# Altium PCB PCB1.PcbDoc
Units mm, origin at the board's own origin, x right, y up, seen from the top; angles counter-clockwise.
Board outline 107 x 57 mm, 2 copper layers (Top Layer, Bottom Layer); 62 components, 61 nets, 266 pads, 34 vias.
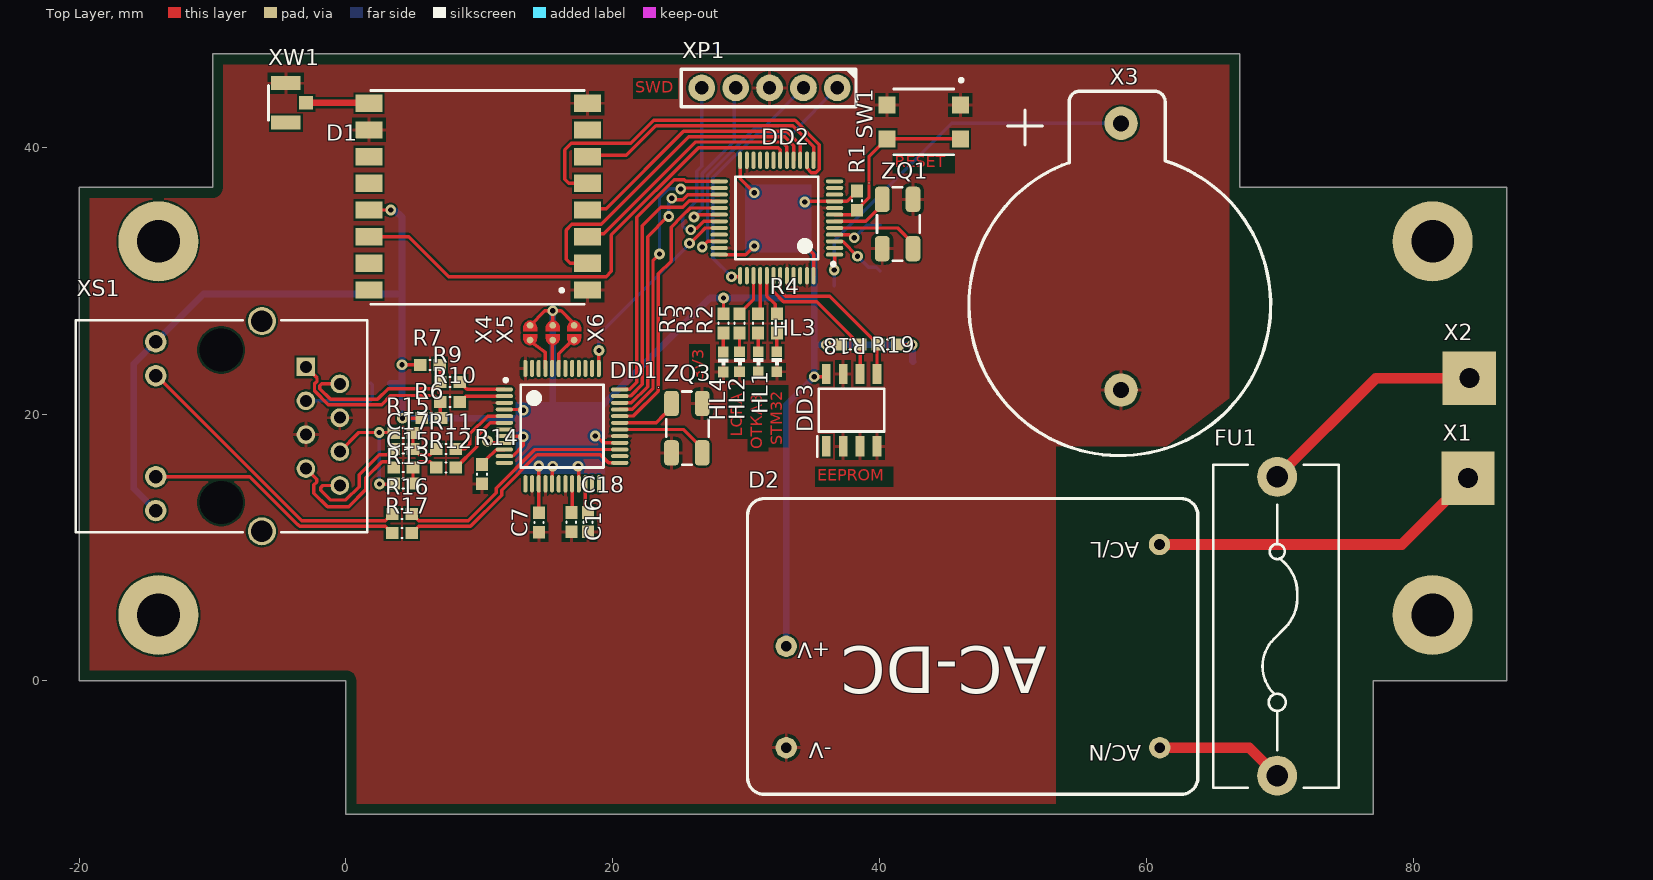
[diagram p0: Top Layer view]
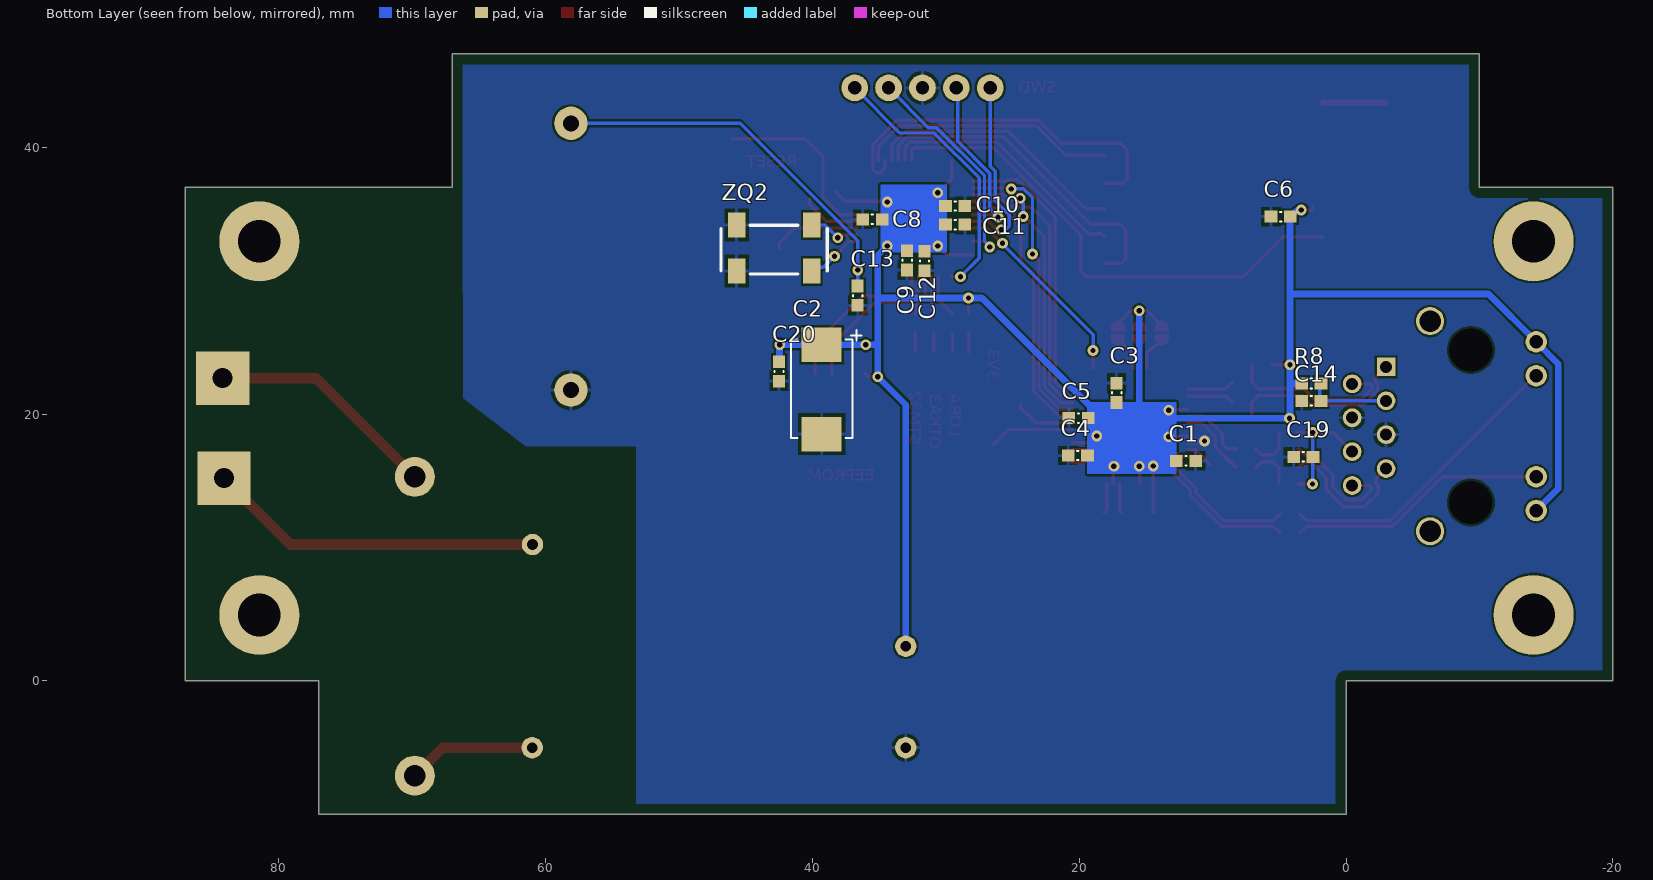
[diagram p1: Bottom Layer view, seen from below]
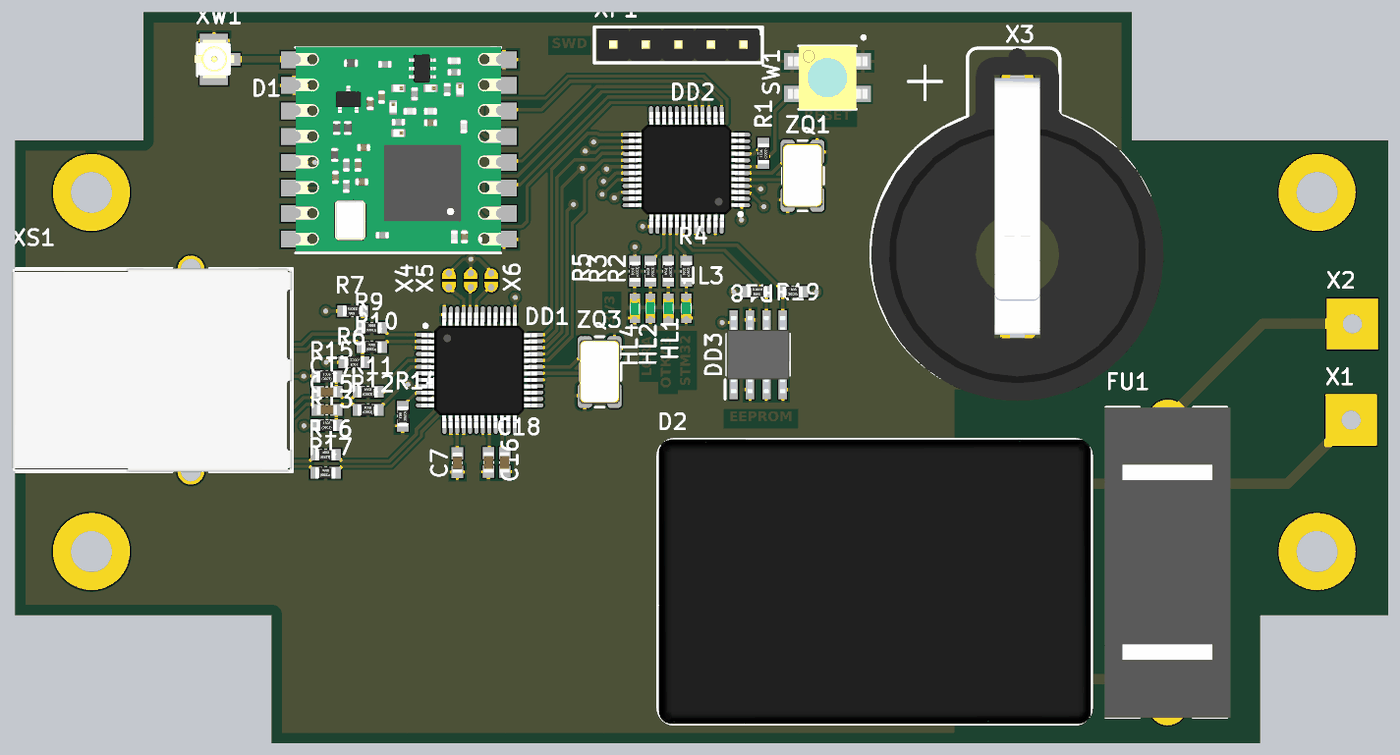
[diagram p2: 3D render of the assembled board from above, using the file's embedded part models]
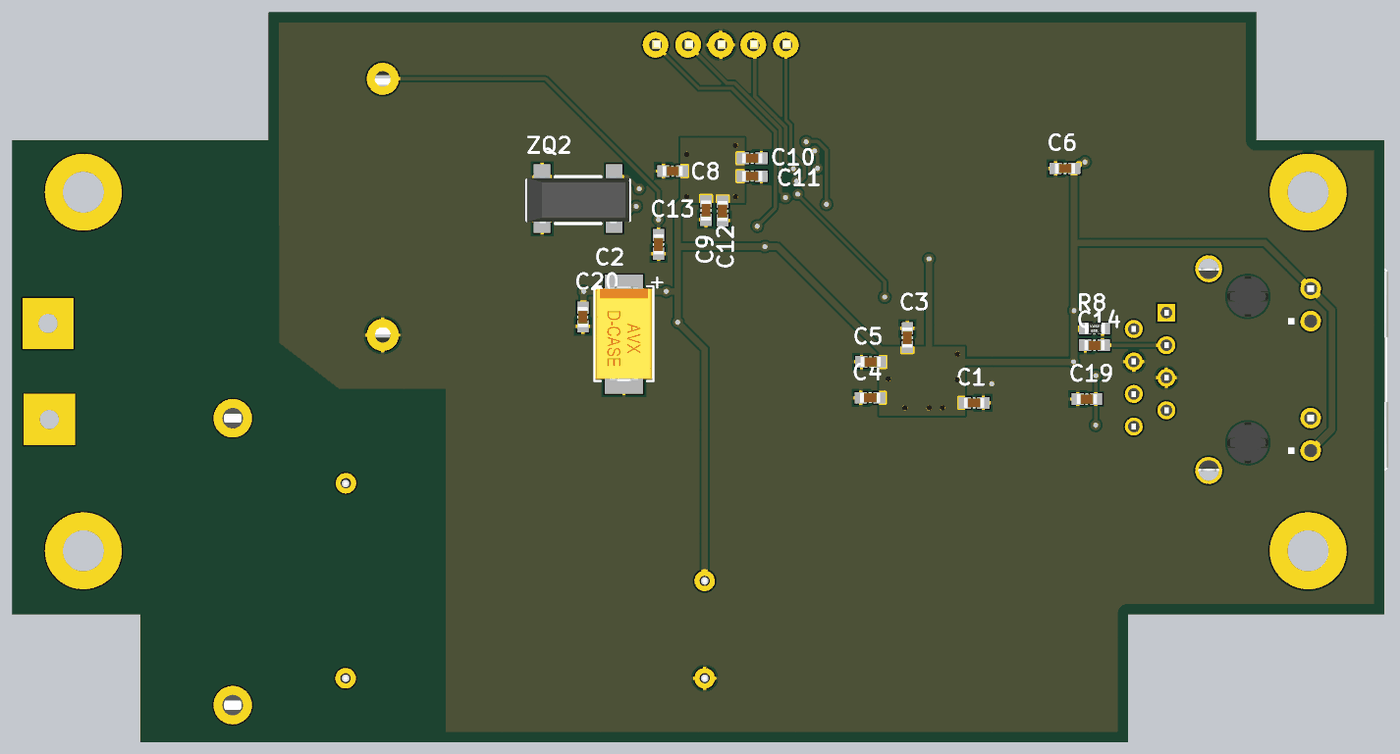
[diagram p3: 3D render of the assembled board from below, using the file's embedded part models]

## Layer stack, top to bottom
Top Solder: solder mask 0.0102, Solder Resist, Dk 3.5
Top Layer: signal copper 0.0356
Dielectric 1: dielectric 0.32, FR-4, Dk 4.8
Bottom Layer: signal copper 0.0356
Bottom Solder: solder mask 0.0102, Solder Resist, Dk 3.5

## Board outline
-20,0 -20,37 -10,37 -10,47 67,47 67,37 87,37 87,0 77,0 77,-10 0,-10 0,0

## Design rules (kind name [scope] priority, off if disabled: settings)
BoardOutlineClearance [All] p1: gap=0.8 ignorepadtopadclearanceinfootprint=FALSE
Clearance [All] p1: gap=0.15 ignorepadtopadclearanceinfootprint=FALSE
DiffPairsRouting [All] p1: maxlimit=0.254 minlimit=0.15 mostfreqgap=0.254 toplayer_minwidth=0.2 toplayer_maxwidth=0.381 toplayer_prefwidth=0.254 bottomlayer_minwidth=0.2 bottomlayer_maxwidth=0.381 bottomlayer_prefwidth=0.254 maxuncoupledlength=12.7
PolygonConnect [All] p1: connectstyle=Relief reliefconductorwidth=0.254 reliefentries=4 polygonreliefangle="90 Angle" airgapwidth=0.254
RoutingVias [All] p1: holewidth=0.4 width=0.8 viastyle="Through Hole" minholewidth=0.4 minwidth=0.8 maxholewidth=0.8 maxwidth=1.27
SolderMaskExpansion [All] p1: expansion=0.102 istentingtop=FALSE
Width [All] p1: maxlimit=1 minlimit=0.2 preferedwidth=0.254
29 further rules are at their usual default settings.

## Classes and differential pairs
component class Sheet2: C1 C2 C4 C13 D1 D2 DD1 DD2 DD3 FU1 HL1 HL2 HL3 HL4 R1 R2 R3 R4 R5 R7 R8 R9 R10 R11 R12 R13 R14 R15 R16 R17 R18 R19 SW1 X1 X2 XP1 XS1 XW1 ZQ1 ZQ3
differential pair TD: +TD_P -TD_N
differential pair RD2: +RD2_P -RD2_N
differential pair TD1: +TD1_P -TD1_N
differential pair RD: +RD_P -RD_N
differential pair RD1: +RD1_P -RD1_N

## Components (designator, comment, footprint, x,y, rotation, side; value= is the part's Value field where it differs from the comment)
C1 "0,1 мк" C_0603 12,16.5 r0 bottom value=0.1µF
C2 "10мк" D_CASE 39.3,25.2 r270 bottom value=10µF
C3 "0,1 мк" C_0603 17.2,21.6 r270 bottom value=0.1µF
C4 "0,1 мк" C_0603 20.1,16.9 r180 bottom value=0.1µF
C5 "0,1 мк" C_0603 20.055,19.7 r180 bottom value=0.1µF
C6 "0,1 мк" C_0603 4.9,34.8 r180 bottom value=0.1µF
C7 "0,1 мк" C_0603 14.465,11.873 r90 top value=0.1µF
C8 "0,1 мк" C_0603 35.5,34.6 r180 bottom value=0.1µF
C9 "0,1 мк" C_0603 32.9,31.525 r90 bottom value=0.1µF
C10 "0,1 мк" C_0603 29.3,35.6 r0 bottom value=0.1µF
C11 "0,1 мк" C_0603 29.3,34.2 r0 bottom value=0.1µF
C12 "4,7 мк" C_0603 31.6,31.475 r90 bottom value=4.7µF
C13 "0,1 мк" C_0603 36.6,28.875 r90 bottom value=0.1µF
C14 "0.022" C_0603 2.6,21 r180 bottom value=10000pF
C15 "6800" C_0603 4.3,16 r0 top value=6800pF
C16 "2,2 мк" C_0603 16.897,11.9 r270 top value=2.2µF
C17 "6800" C_0603 4.3,17.4 r0 top value=6800pF
C18 "10000" C_0603 18.144,11.898 r90 top value=10000pF
C19 "10000" C_0603 3.2,16.8 r180 bottom value=10000pF
C20 "0,1 мк" C_0603 42.5,23.2 r90 bottom value=0.1µF
D1 "RFM98W" RFM98W 17.85,44.3 r180 top
D2 "IRM-10-12" IRM-02 60.175,2.975 r180 top locked
DD1 "W5500" LQFP48 16.2,19.1 r0 top
DD2 "STM32f103c8t6" LQFP48 32.3,34.7 r180 top
DD3 "24LC1026-I_SN" SOIC127P600X175-8N 37.9,20.3 r90 top
FU1 "FHP-105" FHP-105 69.8,15.3 r270 top
HL1 "BL-HJD36A-AV" LED_0603_RED 30.9,23.9 r270 top
HL2 "BL-HKC36A-AV" LED_0603_GREEN 29.5,23.9 r270 top
HL3 "BL-HGK36G" LED_0603_GREEN 32.3,23.9 r270 top
HL4 "BL-HGK36G" LED_0603_GREEN 28.287,23.88 r270 top
R1 "100 кОм" R_0603 38.3,36 r90 top
R2 "2,2 к" R_0603 30.9,26.8 r90 top
R3 "2,2 к" R_0603 29.5,26.8 r90 top
R4 "2,2 к" R_0603 32.3,26.8 r90 top
R5 "2,2 к" R_0603 28.3,26.8 r90 top
R6 "49,9" R_0603 6.4,19.7 r180 top
R7 "49,9" R_0603 6.3,23.7 r180 top
R8 "10" R_0603 2.6,22.3 r0 bottom
R9 "33" R_0603 7.8,22.4 r0 top
R10 "33" R_0603 7.8,20.9 r0 top
R11 "33" R_0603 7.5,17.4 r0 top
R12 "33" R_0603 7.5,16 r0 top
R13 "49,9" R_0603 4.3,14.8 r0 top
R14 "12,4 к" R_0603 10.2,15.5 r90 top
R15 "49,9" R_0603 4.3,18.6 r0 top
R16 "330" R_0603 4.2,12.5 r0 top
R17 "330" R_0603 4.2,11.1 r0 top
R18 "2,2 к" R_0603 40.6,25.2 r0 top
R19 "2,2 к" R_0603 37.8,25.2 r180 top
SW1 "7914G-1-000E" 7914G 43.3,41.9 r270 top
X1 "X" TH_Сontact 84.1,15.2 r0 top
X2 "X" TH_Сontact 84.2,22.7 r0 top
X3 "KLS5-CR2032-01" KLS5-CR2032-01 58.1,21.8 r90 top
X4 "Solder_jumper" SOLDER_JUMPER 13.8,26.125 r270 top
X5 "Solder_jumper" SOLDER_JUMPER 15.5,26.125 r270 top
X6 "Solder_jumper" SOLDER_JUMPER 17.1,26.125 r270 top
XP1 "PLS-5" PLS-5 36.83,44.451 r180 top
XS1 "KLS12-TL051-1x1-G/Y-1-03" KLS12-TL051 1.642,11.153 r90 top
XW1 "IPEX-M 20279-001E-01" IPEX -4.5,43.3 r0 top
ZQ1 "8 МГц" "MJ CRYSTAL" 40.2,36.1 r270 top
ZQ2 "KX-327S" KX-327S 42.9,32.2 r0 bottom
ZQ3 "8 МГц" "MJ CRYSTAL" 24.4,20.8 r270 top

## Footprints (in the part's own frame and the unit in brackets; to place one, negate y for a bottom-side part, rotate by r counter-clockwise, add the part's x,y. Pads: shape width x height; smd on the part's side, far side on the other; paste and mask are expansions set on the pad)
7914G [mm]
  rect 1.27x1.27 smd paste+0 mask+0: 1(-1.27,2.75) 1(-1.27,-2.75) 2(1.27,-2.75) 2(1.27,2.75)
  silkscreen extent -3.25,-2.25 2.46,2.94, body extent -2.46,-3.1 2.46,3.1, height 4.54
C_0603 [mm] "Chip Resistor, 2-Leads, Body 1.60x0.80mm, IPC Medium Density"
  rect 0.95x0.9 smd: 1(-0.725,0) 2(0.725,0)
  silkscreen extent -0.05,-0.35 0.05,0.35, body extent -0.8,-0.4 0.8,0.4, height 0.8
D_CASE [mm]
  rect 2.6x3 smd: 1(0,0) 2(6.7,0)
  silkscreen extent -1.1,-2.3 7,3, body extent -0.4,-2.22 7,2.23, height 3.01
FHP-105 [mm]
  round 3 hole 1.6: 1(0,0) 2(22.4,0)
  silkscreen extent -0.9,-4.8 23.3,4.6, body extent -0.9,-4.9 23.3,4.9, height 10.9
IPEX [mm]
  rect 2.2x1.05 smd: 1(0,1.5) 3(0,-1.45)
  rect 1.05x1 smd: 2(1.525,0.025)
  silkscreen extent -1.3,-1.27 -1.3,1.33, body extent -1.52,-1.45 1.58,1.55, height 1.25
IRM-02 [mm]
  round 1.6 hole 0.8: 1(-0.825,7.975) 2(-0.8,-7.25) 3(27.175,7.975) 4(27.175,0.375)
  silkscreen extent -3.67,-10.7 30.07,11.48, body extent -3.67,-10.73 30.02,11.48, height 15
KLS5-CR2032-01 [mm]
  round 2.5 hole 1.2: 1(0,0) 2(20,0)
  silkscreen extent -4.91,-11.21 22.4,11.41, body extent -5.1,-11.4 22.4,11.4, height 8.7
KLS12-TL051 [mm]
  rect 1.4x1.4 hole 0.9: 1(12.387,4.642)
  round 1.4 hole 0.9: 2(11.117,2.102) 3(9.847,4.642) 4(8.577,2.102) 5(7.307,4.642) 6(6.037,2.102) 7(4.767,4.642) 8(3.497,2.102)
  round 1.6 hole 1.02: 9(14.267,15.892) 10(11.727,15.892) 11(4.157,15.892) 12(1.617,15.892)
  round 0 hole 3.25 unplated: MH1(13.657,10.992) MH2(2.227,10.992)
  round 2.1 hole 1.6: S1(15.817,7.942) S2(0.067,7.942)
  silkscreen extent 0,0.04 15.88,21.88, body extent 0,0.04 15.88,21.88, height 13.5
KX-327S [mm]
  rect 1.3x1.9 smd: 1(-2.85,-1.975) 2(2.775,-1.975) 3(2.775,1.475) 4(-2.85,1.475)
  silkscreen extent -4.03,-1.95 3.95,1.7, body extent -4.03,-2 3.97,1.7, height 2.5
LED_0603_GREEN [mm]
  rect 0.8x0.8 smd: 1(-0.775,0) 2(0.725,0)
  silkscreen extent -0.3,-0.4 0.25,0.4, body extent -0.8,-0.4 0.8,0.4, height 0.6
LED_0603_RED [mm]
  rect 0.8x0.8 smd: 1(-0.775,0) 2(0.725,0)
  silkscreen extent -0.3,-0.4 0.25,0.4, body extent -0.8,-0.4 0.8,0.4, height 0.65
LQFP48 [mm] "TSQFP, 48-Leads, Body 7,00x7,00mm, Pitch 0,50mm, IPC Medium Density"
  oval 1.3x0.3 smd: 1(-4.325,2.75) 2(-4.325,2.25) 3(-4.325,1.75) 4(-4.325,1.25) 5(-4.325,0.75) 6(-4.325,0.25) 7(-4.325,-0.25) 8(-4.325,-0.75) 9(-4.325,-1.25) 10(-4.325,-1.75) 11(-4.325,-2.25) 12(-4.325,-2.75) 25(4.325,-2.75) 26(4.325,-2.25) 27(4.325,-1.75) 28(4.325,-1.25) 29(4.325,-0.75) 30(4.325,-0.25) 31(4.325,0.25) 32(4.325,0.75) 33(4.325,1.25) 34(4.325,1.75) 35(4.325,2.25) 36(4.325,2.75)
  oval 0.3x1.3 smd: 13(-2.75,-4.325) 14(-2.25,-4.325) 15(-1.75,-4.325) 16(-1.25,-4.325) 17(-0.75,-4.325) 18(-0.25,-4.325) 19(0.25,-4.325) 20(0.75,-4.325) 21(1.25,-4.325) 22(1.75,-4.325) 23(2.25,-4.325) 24(2.75,-4.325) 37(2.75,4.325) 38(2.25,4.325) 39(1.75,4.325) 40(1.25,4.325) 41(0.75,4.325) 42(0.25,4.325) 43(-0.25,4.325) 44(-0.75,4.325) 45(-1.25,4.325) 46(-1.75,4.325) 47(-2.25,4.325) 48(-2.75,4.325)
  silkscreen extent -4.35,-3.1 3.1,3.57, body extent -4.53,-4.53 4.47,4.47, height 1.5
"MJ CRYSTAL" [mm]
  rrect50% 1.9x1.1 smd: 1(0,0) 2(3.7,0) 3(3.7,2.3) 4(0,2.3)
  silkscreen extent -0.9,-0.4 4.6,2.8, body extent -0.67,-0.46 4.33,2.74, height 1
PLS-5 [mm]
  round 2 hole 1: 1(0,0) 2(2.54,0) 3(5.08,0) 4(7.62,0) 5(10.16,0)
  silkscreen extent -1.4,-1.4 11.7,1.4, body extent -1.2,-1.3 11.5,1.24, height 8.54
R_0603 [mm] "Chip Resistor, 2-Leads, Body 1.60x0.80mm, IPC Medium Density"
  rect 0.95x0.9 smd: 1(-0.725,0) 2(0.725,0)
  silkscreen extent -0.05,-0.38 0.05,0.38, body extent -0.8,-0.45 0.75,0.4, height 0.45
RFM98W [mm]
  rect 2x1.3 smd: 1(-0.25,15) 2(-0.25,13) 3(-0.25,11) 4(-0.25,9) 5(-0.25,7) 6(-0.25,5) 7(-0.25,3) 8(-0.25,1) 9(16.125,1) 10(16.125,3) 11(16.125,5) 12(16.125,7) 13(16.125,9) 14(16.125,11) 15(16.125,13) 16(16.125,15)
  silkscreen extent 0,0.05 16,16.07, body extent -0.02,-0.03 15.98,15.97, height 2.04
SOIC127P600X175-8N [mm]
  rect 1.525x0.65 smd: 1(-2.712,1.905) 2(-2.712,0.635) 3(-2.712,-0.635) 4(-2.712,-1.905) 5(2.712,-1.905) 6(2.712,-0.635) 7(2.712,0.635) 8(2.712,1.905)
  silkscreen extent -3.47,-2.45 1.6,2.58, body extent -3,-2.45 3,2.45, height 1.75
SOLDER_JUMPER [mm]
  rrect100% 0.5x0.5 smd: 1(-0.525,0) 2(0.575,0)
  Top Layer region: 0.144,-0.519 0.369,-0.519 0.587,-0.491 0.777,-0.381 0.911,-0.207 0.969,0.006 0.969,0.006 0.906,0.222 0.765,0.398 0.567,0.506 0.344,0.531 0.344,0.531 0.144,0.531
  Top Layer region: -0.075,0.525 -0.3,0.525 -0.518,0.497 -0.709,0.387 -0.843,0.212 -0.9,0 -0.9,0 -0.837,-0.216 -0.696,-0.392 -0.499,-0.5 -0.275,-0.525 -0.275,-0.525 -0.075,-0.525
TH_Сontact [mm]
  rect 4x4 hole 1.5: 1(0,0)

## Part data
C1 C8 C9 C10 C11 C13 C20: library part GRM188R72A104MA35D, "CAP CER 0.1UF 100V X7R 0603", Manufacturer="Murata Electronics", Component Type=Capasitor, ComponentLink1Description=Datasheet, ComponentLink1URL=https://search.murata.co.jp/Ceramy/image/img/A01X/G101/ENG/GRM188R72A104MA35-01.pdf, Part Number=GRM188R72A104MA35D
C2: library part T491D106K035AT, "CAP TANT 10UF 10% 35V 2917", Manufacturer=KEMET, Component Type="Tantalum Capacitor", ComponentLink1Description=Datasheet, ComponentLink1URL=https://api.kemet.com/component-edge/download/datasheet/T491D106K035AT.pdf, Part Number=T491D106K035AT
C3 C4 C5 C6 C7: library part GRM188R72A104KA35D, "CAP CER 0.1UF 100V X7R 0603", Manufacturer="Murata Electronics", Component Type=Capasitor, ComponentLink1Description=Datasheet, ComponentLink1URL=https://www.murata.com/~/media/webrenewal/support/library/catalog/products/capacitor/mlcc/c02e.ashx?la=en-us, Part Number=GRM188R72A104KA35D
C12: library part GRM188R61C475KE11D, "CAP CER 4.7UF 16V X5R 0603", Manufacturer="Murata Electronics", Component Type=Capasitor, ComponentLink1Description=Datasheet, ComponentLink1URL=https://search.murata.co.jp/Ceramy/image/img/A01X/G101/ENG/GRM188R61C475KE11-01.pdf, Part Number=GRM188R61C475KE11D
C14 C18 C19: library part GRM1885C1H103JA01D, "CAP CER 10000PF 50V C0G/NP0 0603", Manufacturer="Murata Electronics", Component Type=Capasitor, ComponentLink1Description=Datasheet, ComponentLink1URL=https://www.murata.com/~/media/webrenewal/support/library/catalog/products/capacitor/mlcc/c02e.ashx?la=en-us, Part Number=GRM1885C1H103JA01D
C15 C17: library part GRM1885C1H682JA01D, "CAP CER 6800PF 50V C0G/NP0 0603", Manufacturer="Murata Electronics", Component Type=Capasitor, ComponentLink1Description=Datasheet, ComponentLink1URL=https://www.murata.com/~/media/webrenewal/support/library/catalog/products/capacitor/mlcc/c02e.ashx?la=en-us, Part Number=GRM1885C1H682JA01D
C16: library part GRM188R71A225ME15D, "CAP CER 2.2UF 10V X7R 0603", Manufacturer="Murata Electronics", Component Type=Capasitor, ComponentLink1Description=Datasheet, ComponentLink1URL=https://www.murata.com/~/media/webrenewal/support/library/catalog/products/capacitor/mlcc/c02e.ashx?la=en-us, Part Number=GRM188R71A225ME15D
D1: "LoRa modem"
D2: library part IRM-02-3.3, "АС-DC преобразователь"
DD1: "Hardwired TCP/IP embedded Ethernet controller"
DD3: "Integrated Circuit", Arrow Part Number=24LC1026-I/SN, Manufacturer_Name=Microchip, Mouser Part Number=579-24LC1026-I/SN, Arrow Price/Stock=https://www.arrow.com/en/products/24lc1026-isn/microchip-technology, Datasheet Link=https://componentsearchengine.com/Datasheets/2/24LC1026-I_SN.pdf, Height=1.75mm, Manufacturer_Part_Number=24LC1026-I/SN, Mouser Price/Stock=https://www.mouser.co.uk/ProductDetail/Microchip-Technology/24LC1026-I-SN?qs=uHi2%2FQoPa5AHb5C3N5zZbQ%3D%3D
HL1: "SMD LED 0603 TOP красный"
HL2: "SMD LED 0603 TOP желтый"
HL3 HL4: "SMD LED 0603 TOP зеленый"
R1: library part CR0603-FX-1003ELF, "RES SMD 100K OHM 1% 1/10W 0603", Manufacturer="Bourns Inc.", Component Type=Resistor, ComponentLink1Description=Datasheet, ComponentLink1URL=https://www.bourns.com/pdfs/chpreztr.pdf, Part Number=CR0603-FX-1003ELF
R2 R3 R4 R5 R18 R19: library part CR0603-FX-2201ELF, "RES SMD 2.2K OHM 1% 1/10W 0603", Manufacturer="Bourns Inc.", Component Type=Resistor, ComponentLink1Description=Datasheet, ComponentLink1URL=https://www.bourns.com/pdfs/chpreztr.pdf, Part Number=CR0603-FX-2201ELF
R6 R7 R13 R15: library part CR0603-FX-49R9ELF, "RES SMD 49.9 OHM 1% 1/10W 0603", Manufacturer="Bourns Inc.", Component Type=Resistor, ComponentLink1Description=Datasheet, ComponentLink1URL=https://www.bourns.com/pdfs/chpreztr.pdf, Part Number=CR0603-FX-49R9ELF
R8: library part CR0603-FX-10R0ELF, "RES SMD 10 OHM 1% 1/10W 0603", Manufacturer="Bourns Inc.", Component Type=Resistor, ComponentLink1Description=Datasheet, ComponentLink1URL=https://www.bourns.com/pdfs/chpreztr.pdf, Part Number=CR0603-FX-10R0ELF
R9 R10 R11 R12: library part CR0603-FX-33R0ELF, "RES SMD 33 OHM 1% 1/10W 0603", Manufacturer="Bourns Inc.", Component Type=Resistor, ComponentLink1Description=Datasheet, ComponentLink1URL=https://www.bourns.com/pdfs/chpreztr.pdf, Part Number=CR0603-FX-33R0ELF
R14: library part CR0603-FX-1242ELF, "RES SMD 12.4K OHM 1% 1/10W 0603", Manufacturer="Bourns Inc.", Component Type=Resistor, ComponentLink1Description=Datasheet, ComponentLink1URL=https://www.bourns.com/pdfs/chpreztr.pdf, Part Number=CR0603-FX-1242ELF
R16 R17: library part CR0603-FX-3300ELF, "RES SMD 330 OHM 1% 1/10W 0603", Manufacturer="Bourns Inc.", Component Type=Resistor, ComponentLink1Description=Datasheet, ComponentLink1URL=https://www.bourns.com/pdfs/chpreztr.pdf, Part Number=CR0603-FX-3300ELF
SW1: "Тактовый переключатель SMD"
X1 X2: "Контактная площадка"
X3: "Батарейный отсек на 1xCR2032"
XS1: "TJ16S-8P8C Разъем на плату 8-8 (RJ-45)"
ZQ1 ZQ3: library part NX5032GA-8MHz
ZQ2: "Кварцевый резонатор 32.768 кГц, 20 ppm"

## Free pads (board coordinates)
  round 6 hole 3.2: 0(-14.054,4.947) 0(-14.054,32.947) 0(81.446,4.947) 0(81.446,32.947)

## Via types
v1: diameter 0.8, hole 0.4, Top Layer to Bottom Layer, tented both sides, 34 vias

## Nets (pads, with @x,y where several pads share a name; then routed paths per layer and width w, separated by ;. In a path a pad name is that pad's centre, name@x,y a point inside that pad or via, vN(x,y) a via of type N, cw(c..) or ccw(c..) an arc to the next point about the centre after c; other vN are vias at no path point)
3V3: C1.2 C2.1 C3.2 C4.2 C5.2 C6.2 C7.2 C8.2 C9.2 C10.2 C11.2 C12.2 C20.2 D1.13 D2.4 DD1.4 DD1.8 DD1.11 DD1.15 DD1.17 DD1.21 DD1.28 DD2.9 DD2.24 DD2.36 DD2.48 DD3.8 R1.2 R5.2 R6.2 R7.2 R8.2 R18.2 R19.2 X4.1 X5.1 X6.1 XS1.9 XS1.12 | length 180.5
  Top Layer w0.254: D1.13@2.475,35.423 D1.13@2.475,35.6 ; D1.13@2.598,35.3 v1(3.35,35.3) ; v1(4.2,23.7) R7.2 ; v1(4.241,19.7) R6.2 ; DD1.11 11.884,16.859 12.488,16.859 13.3,17.671 v1(13.3,18.3) 13.25,18.35 DD1.8 ; DD1.4 13.25,20.35 v1(13.3,20.3) ; X4.1@13.811,26.636 14.916,27.741 15.507,27.741 v1(15.51,27.744) ; v1(14.448,16.113) 14.45,16.111 DD1.15 14.45,12.612 C7.2 ; DD1.17 15.45,16.05 v1(15.5,16.1) ; X5.1 15.505,26.655 15.505,27.739 v1(15.51,27.744) ; X6.1@17.111,26.636 17.111,26.706 16.977,26.84 16.977,26.904 16.121,27.759 15.525,27.759 v1(15.51,27.744) ; v1(17.4,16.1) 17.45,16.05 DD1.21 ; v1(18.688,18.366) 18.76,18.366 19.277,17.85 DD1.28 ; DD2.36 29.95,31.95 v1(30.6,32.6) ; R5.2 v1(28.3,28.7) ; DD2.24 29.55,37.65 v1(30.6,36.6) ; v1(34.4,32.6) 34.416,32.6 35.05,31.966 DD2.48 ; v1(34.4,35.9) 34.441,35.941 36.616,35.941 DD2.9 36.634,35.959 37.559,35.959 38.3,36.7 R1.2 ; v1(35.096,22.8) 35.797,22.8 35.995,22.998 DD3.8 ; v1(36,25.2) R19.2 ; R18.2 41.425,25.1 41.521,25.196 v1(42.434,25.196)
  Bottom Layer w0.254: v1(14.448,16.113) 14.448,16.598 16.05,18.2
  Bottom Layer w0.5: XS1.12 -15.9,14.421 -15.9,23.769 XS1.9 -10.669,29 4.2,29 ; R8.2 4.2,22.3 ; v1(3.35,35.3) 3.408,35.243 3.707,35.243 3.95,35 3.975,35 4.2,34.775 4.2,29 ; v1(13.3,18.3) 13.9,18.3 15.51,19.91 v1(15.51,27.744) ; v1(13.3,20.3) 13.3,20.05 12.95,19.7 v1(4.241,19.7) 4.2,19.741 4.2,22.3 ; v1(18.688,18.366) 18.688,20.088 19.1,20.5 19.1,20.6 19.2,20.6 27.3,28.7 v1(28.3,28.7) 35.096,28.7 ; D2.4 33,20.705 v1(35.096,22.8) 35.096,25.2 ; v1(34.4,35.9) 33.65,35.9 32.4,34.65 34.4,32.65 v1(34.4,32.6) 35.096,31.905 35.096,28.7 ; v1@42.43,25.2 C2.1 v1(36,25.2) 35.096,25.2 ; v1(42.434,25.196) 42.467,25.163 42.467,23.958 C20.2 ; 4.2,22.3 v1(4.2,23.7) 4.2,29 ; 35.096,25.2 35.096,28.7
220V_L: D2.1 FU1.2 | length 9.7
  Top Layer w0.8: D2.1 67.7,-5 FU1.2
220V_N: D2.2 X1.1 | length 25.2
  Top Layer w0.8: D2.2 79.125,10.225 80.776,11.876 X1.1
EEPROM_SCL: DD2.42 DD3.6 R19.1 | length 11.5
  Top Layer w0.254: DD2.42 32.05,29.179 32.797,28.432 35.293,28.432 38.177,25.548 38.177,25.523 38.5,25.2 R19.1 38.535,25.19 DD3.6
EEPROM_SDA: DD2.43 DD3.5 R18.1 | length 12.4
  Top Layer w0.254: DD2.43 32.55,29.25 32.964,28.836 36.264,28.836 39.527,25.573 39.527,25.523 39.85,25.2 R18.1 39.805,25.13 DD3.5
ERROR: DD2.40 R2.2 | length 2.9
  Top Layer w0.254: R2.2 31.05,27.675 DD2.40
ET_INTn: DD1.36 DD2.25 | length 21.2
  Top Layer w0.254: DD1.36 20.534,21.859 21.259,21.859 21.8,22.4 21.8,34.757 24.598,37.555 25.372,37.555 25.477,37.45 DD2.25
ET_MISO: DD1.34 DD2.27 | length 21.2
  Top Layer w0.254: DD1.34 20.534,20.859 21.401,20.859 22.608,22.065 22.608,33.308 24.116,34.816 v1(24.2,34.816) ; v1(24.427,36.17) 24.523,36.074 25.245,36.074 25.621,36.45 DD2.27
  Bottom Layer w0.254: v1(24.2,34.816) 24.2,35.795 24.427,36.022 v1(24.427,36.17)
ET_MOSI: DD1.35 DD2.28 | length 20.5
  Top Layer w0.254: DD1.35 20.534,21.359 21.33,21.359 22.204,22.233 22.204,34.104 23.6,35.5 24.14,35.5 24.147,35.493 24.708,35.493 24.715,35.5 25.242,35.5 25.734,35.992 27.421,35.992 27.463,35.95 DD2.28
ET_RSTn: DD1.37 DD2.32 | length 14.9
  Top Layer w0.254: DD1.37 18.95,24.75 v1(18.963,24.763) ; v1(25.746,32.8) 25.8,32.8 26.526,33.526 26.526,33.532 26.944,33.95 DD2.32
  Bottom Layer w0.254: v1(18.963,24.763) 18.963,25.963 25.746,32.746 v1(25.746,32.8)
ET_SCK: DD1.33 DD2.26 | length 22.4
  Top Layer w0.254: DD1.33 20.534,20.359 21.473,20.359 23.012,21.898 23.012,31.512 v1(23.506,32.006) ; v1(25.091,36.878) 25.164,36.95 DD2.26
  Bottom Layer w0.254: v1(23.506,32.006) 23.506,32.894 23.5,32.9 23.5,36.2 24.2,36.9 25.069,36.9 v1(25.091,36.878)
ET_SCSn: DD1.32 DD2.29 | length 20.5
  Top Layer w0.254: DD1.32 20.534,19.859 21.544,19.859 23.416,21.731 23.416,30.516 24.374,31.474 24.374,34.017 25.218,34.861 25.807,35.45 DD2.29
GND: C1.1 C2.2 C3.1 C4.1 C5.1 C6.1 C7.1 C8.1 C9.1 C10.1 C11.1 C12.1 C13.1 C14.1 C16.2 C18.1 C19.1 C20.1 D1.1 D1.8 D1.10 D2.3 DD1.3 DD1.9 DD1.14 DD1.16 DD1.19 DD1.29 DD1.48 DD2.8 DD2.23 DD2.35 DD2.44 DD2.47 DD3.2 DD3.3 DD3.4 DD3.7 HL1.2 HL2.2 HL3.2 HL4.2 R14.1 SW1.1 X3.1 XP1.3 XS1.4 XS1.5 XW1.1 ZQ1.2 ZQ1.4 ZQ2.2 ZQ2.3 ZQ3.2 ZQ3.4 | length 0.9
  Top Layer w0.254: v1@10.95,17.85 DD1.9
  other v1: 10.612,17.984
LORA_DIO0: D1.14 DD2.18 | length 38.5
  Top Layer w0.254: D1.14 4.7,33.3 7.7,30.3 19.5,30.3 19.9,30.7 19.9,33.429 26.423,39.952 32.392,39.952 32.541,39.803 32.541,39.034 DD2.18
LORA_MISO: D1.2 DD2.16 | length 25.2
  Top Layer w0.254: D1.2 16.8,31.3 16.5,31.6 16.5,33.8 16.927,34.227 19.127,34.227 25.696,40.796 32.875,40.796 33.55,40.121 DD2.16
LORA_MOSI: D1.3 DD2.17 | length 19.1
  Top Layer w0.254: D1.3 18.332,33.532 19.332,33.532 26.192,40.392 32.708,40.392 33.041,40.059 33.041,39.034 DD2.17
LORA_NSS: D1.5 DD2.14 | length 28.4
  Top Layer w0.254: D1.5 16.7,37.3 16.4,37.6 16.4,39.8 16.9,40.3 21.354,40.3 23.07,42.016 33.661,42.016 35.477,40.2 35.477,38.348 35.227,38.098 34.873,38.098 34.559,38.412 34.559,39.016 DD2.14
LORA_RST: D1.6 DD2.13 | length 19.6
  Top Layer w0.254: D1.6 18.2,39.4 21.025,39.4 23.237,41.612 33.494,41.612 35.05,40.056 DD2.13
LORA_SCK: D1.4 DD2.15 | length 20
  Top Layer w0.254: D1.4 18.2,35.4 19.5,35.4 25.3,41.2 26.792,41.2 26.8,41.208 32.969,41.208 32.977,41.2 33.043,41.2 34.05,40.193 DD2.15
LORA_TX: DD2.39 R3.2 | length 3.3
  Top Layer w0.254: R3.2 29.5,27.55 30.55,28.6 DD2.39
NetC14_2: C14.2 R8.1 XS1.3 | length 6.3
  Bottom Layer w0.256: XS1.3 C14.2 1.975,21.1 1.975,22.2 R8.1
NetC16_1: C16.1 DD1.20 | length 2.2
  Top Layer w0.254: C16.1 16.95,12.677 DD1.20
NetC18_2: C18.2 DD1.22 | length 2.2
  Top Layer w0.254: DD1.22 17.95,12.817 C18.2
NetC19_2: C19.2 R13.1 R15.1 XS1.6 | length 9.6
  Top Layer w0.256: XS1.6 0.972,18.622 3.553,18.622 R15.1 ; v1(2.515,14.76) 3.535,14.76 R13.1
  Bottom Layer w0.256: v1(2.494,18.622) 2.504,18.612 2.504,14.77 v1(2.515,14.76)
NetD1_9: D1.9 XW1.2 | length 4.9
  Top Layer w0.254: D1.9@1.6,43.325 D1.9@1.675,43.4 ; D1.9 1.775,43.3 D1.9@1.825,43.3
  Top Layer w0.4: D1.9@1.675,43.4 D1.9@1.775,43.3
  Top Layer w0.5: XW1.2 D1.9@1.6,43.325
NetDD1_10: DD1.10 R14.2 | length 2.2
  Top Layer w0.254: R14.2 10.523,16.548 10.523,16.602 11.262,17.341 11.866,17.341 DD1.10
NetDD1_25: DD1.25 R17.2 | length 18.5
  Top Layer w0.256: R17.2 4.95,11.1 5.444,11.594 9.336,11.594 11.665,13.922 11.665,14.291 14.318,16.944 19.078,16.944 19.68,16.342 20.517,16.342 DD1.25
NetDD1_27: DD1.27 R16.2 | length 18.2
  Top Layer w0.256: R16.2 4.95,12.5 5.45,12 9.168,12 10.715,13.547 11.259,14.091 11.259,14.459 14.15,17.35 DD1.27
NetDD1_30: DD1.30 ZQ3.3 | length 6.4
  Top Layer w0.254: DD1.30 25.298,18.85 26.384,17.764 ZQ3.3@26.455,17.764
NetDD1_31: DD1.31 ZQ3.1 | length 4.7
  Top Layer w0.254: DD1.31 23.25,19.35 23.877,19.977 23.897,19.977 24.4,20.48 ZQ3.1
NetDD1_43: DD1.43 X6.2 | length 2.7
  Top Layer w0.254: DD1.43 15.95,24.518 16.95,25.518 17.068,25.518 X6.2
NetDD1_44: DD1.44 X5.2 | length 2.1
  Top Layer w0.254: DD1.44 15.459,23.434 15.459,25.509 X5.2
NetDD1_45: DD1.45 X4.2 | length 2.7
  Top Layer w0.254: X4.2 13.814,25.461 14.95,24.627 DD1.45
NetDD2_3: DD2.3 ZQ2.4 | length 4.3
  Top Layer w0.254: DD2.3 36.634,32.941 37.238,32.941 v1(38.339,31.839)
  Bottom Layer w0.254: v1(38.339,31.839) 39.168,31.011 39.764,31.011 ZQ2.4
NetDD2_4: DD2.4 ZQ2.1 | length 3.9
  Top Layer w0.254: DD2.4 37.724,33.45 37.955,33.219 v1(38.103,33.219)
  Bottom Layer w0.254: v1(38.103,33.219) 39.059,34.175 ZQ2.1
NetDD2_5: DD2.5 ZQ1.3 | length 6.8
  Top Layer w0.254: DD2.5 41.35,33.95 42.5,32.8 ZQ1.3
NetDD2_6: DD2.6 ZQ1.1 | length 4.5
  Top Layer w0.254: DD2.6 38.95,34.45 40.2,35.7 ZQ1.1
NetFU1_1: FU1.1 X2.1 | length 17.5
  Top Layer w0.8: FU1.1 77.2,22.7 X2.1
NetHL1_1: HL1.1 R2.1 | length 1.4
  Top Layer w0.254: HL1.1 R2.1
NetHL2_1: HL2.1 R3.1 | length 1.4
  Top Layer w0.254: HL2.1 R3.1
NetHL3_1: HL3.1 R4.1 | length 1.4
  Top Layer w0.254: HL3.1 R4.1
NetHL4_1: HL4.1 R5.1 | length 1.4
  Top Layer w0.254: HL4.1 28.269,24.672 28.269,26.044 R5.1
NetR16_1: R16.1 XS1.10 | length 22.4
  Top Layer w0.256: XS1.10 -14.18,22.88 -3.3,12 2.95,12 3.45,12.5 R16.1
NetR17_1: R17.1 XS1.11 | length 19.5
  Top Layer w0.256: XS1.11 -14.239,15.3 -7.2,15.3 -3.6,11.7 -3.574,11.7 -3.468,11.594 2.956,11.594 3.45,11.1 R17.1
R\S\T\: DD2.7 R1.1 SW1.2 | length 13.6
  Top Layer w0.254: DD2.7 37.977,34.95 38.3,35.273 R1.1 38.3,35.3 39.2,36.2 39.2,39.28 40.55,40.63 SW1.2@46.05,40.63
RD1_N: C17.2 R11.1 R15.2 | length 3.3
  Top Layer w0.256: R15.2 C17.2 5.05,17.4 5.495,16.955 6.305,16.955 6.75,17.4 R11.1
RD1_P: C15.2 R12.1 R13.2 | length 3.3
  Top Layer w0.256: R13.2 C15.2 5.05,16 5.495,16.445 6.305,16.445 6.75,16 R12.1
RD2_N: DD1.5 R11.2 | length 5.1
  Top Layer w0.256: R11.2 8.234,17.391 8.934,17.391 9.295,17.752 9.295,18.523 10.617,19.845 11.355,19.845 11.36,19.85 DD1.5
RD2_P: DD1.6 R12.2 | length 5.5
  Top Layer w0.256: R12.2 8.25,16 9.795,17.545 9.795,18.316 10.824,19.345 11.87,19.345 DD1.6
RD_N: C17.1 XS1.8 | length 9.6
  Top Layer w0.256: XS1.8 -1.741,14.65 -1.891,14.5 -1.891,14.288 -1.169,13.566 -0.011,13.566 0.986,14.563 0.986,15.45 2.491,16.955 3.105,16.955 3.55,17.4 C17.1
RD_P: C15.1 XS1.7 | length 10.8
  Top Layer w0.256: XS1.7 -2.202,15.122 -2.202,14.91 -2.401,14.711 -2.401,14.077 -1.381,13.056 0.2,13.056 1.496,14.352 1.496,15.239 2.702,16.445 3.105,16.445 3.55,16 C15.1
STM_READY: DD2.41 R4.2 | length 3.2
  Top Layer w0.254: DD2.41 31.55,28.85 32.168,28.232 32.168,27.657 R4.2
SWCLK: DD2.37 XP1.1 | length 20.8
  Top Layer w0.254: v1(28.9,30.3) 29.529,30.3 29.55,30.321 DD2.37
  Bottom Layer w0.254: v1(28.9,30.3) 27.5,31.7 27.5,37.7 30.866,41.066 33.445,41.066 XP1.1
SWDIO: DD2.34 XP1.2 | length 16.9
  Top Layer w0.254: v1(26.695,32.528) 27.117,32.95 DD2.34
  Bottom Layer w0.254: v1(26.695,32.528) 26.695,32.549 27.096,32.95 27.096,37.867 30.699,41.47 31.309,41.47 XP1.2
TD1_N: DD1.2 R10.2 | length 3.5
  Top Layer w0.256: R10.2 8.55,20.9 8.99,21.34 9.477,21.34 11.865,21.34 DD1.2
TD1_P: DD1.1 R9.2 | length 3.6
  Top Layer w0.256: R9.2 8.55,22.4 8.872,22.078 8.872,22.053 9.075,21.85 9.688,21.85 DD1.1
TD_N: R7.1 R9.1 XS1.2 | length 13
  Top Layer w0.256: XS1.2 -1.801,22.27 -1.951,22.12 -1.951,21.908 -1.157,21.114 2.364,21.114 3.155,21.905 6.578,21.905 6.728,22.055 6.728,22.078 7.05,22.4 R9.1 7.075,23.65 R7.1
TD_P: R6.1 R10.1 XS1.1 | length 13.8
  Top Layer w0.256: XS1.1 -2.166,22.706 -2.166,22.479 -2.357,22.288 -2.357,21.74 -1.325,20.708 2.68,20.708 3.367,21.395 6.578,21.395 6.728,21.245 6.728,21.222 7.05,20.9 R10.1 7.075,19.75 R6.1
UART_RX: DD2.31 XP1.5 | length 14.1
  Top Layer w0.254: v1(25.849,33.807) 25.954,33.911 26.14,33.911 26.152,33.923 26.28,33.923 26.807,34.45 DD2.31
  Bottom Layer w0.254: v1(25.849,33.807) 25.745,33.911 25.416,33.911 25.238,34.09 25.238,34.938 26.288,35.988 26.288,38.202 26.67,38.584 XP1.5
UART_TX: DD2.30 XP1.4 | length 12.9
  Top Layer w0.254: v1(26.088,34.773) 26.236,34.773 26.413,34.95 DD2.30
  Bottom Layer w0.254: v1(26.088,34.773) 26.692,35.377 26.692,38.035 29.1,40.443 29.1,44.341 XP1.4
VBAT: C13.2 DD2.1 X3.2 | length 29.7
  Top Layer w0.254: v1(36.6,30.8) 36.625,30.825 DD2.1
  Bottom Layer w0.254: C13.2 v1(36.6,30.8) 36.6,33 45.4,41.8 X3.2
pads on no net: D1.7 D1.11 D1.12 D1.15 D1.16 DD1.7 DD1.12 DD1.13 DD1.18 DD1.23 DD1.24 DD1.26 DD1.38 DD1.39 DD1.40 DD1.41 DD1.42 DD1.46 DD1.47 DD2.2 DD2.10 DD2.11 DD2.12 DD2.19 DD2.20 DD2.21 DD2.22 DD2.33 DD2.38 DD2.45 DD2.46 DD3.1 XS1.MH1 XS1.MH2 XS1.S1 XS1.S2 XW1.3

## Polygon pours and split planes (outlines as drawn)
GND on Bottom Layer "NONET_L-01_P-001" (solid, pour order 0): -27,55 67,55 67,-24.852 -27,-21
GND on Top Layer "NONET_L-01_P-001" (solid, remove dead copper, pour order 1): -26.232,53.996 68.1,53.996 68.1,-25.87 -26.232,-22.004

## Other copper
Top Layer:
  pour cut-out: 66.193,37 66.193,21.2 61.5,17.6 53.2,17.6 53.2,-11 95.2,-11 95.2,37.1
  text "SWD" at 21.678,43.8 h1.5
  text "RESET" at 41.131,38.2 h1.5
  text "3V3" at 27.1,22.53 h1.5 r90
  text "LORA" at 30,18.315 h1.5 r90
  text "STM32" at 33,17.667 h1.5 r90
  text "ОТКАЗ" at 31.5,17.376 h1.5 r90
  text "EEPROM" at 35.34,14.7 h1.5
Bottom Layer:
  rectangle net 3V3: 12.7,15.5 19.4,20.9
  rectangle net 3V3: 29.9,32.1 34.9,37.2
  pour cut-out: 66.193,37 66.18,21.193 61.5,17.6 53.2,17.6 53.2,-11 95.2,-11 95.2,37.1

## Silkscreen, mask and mechanical layers (free items; w line width, h text height)
KONT:
  the board outline again, w0.1

## Text inside footprints (layer, text, board x,y; h text height)
D2: Top Overlay "AC-DC" at 52.525,3.725 h6 r180; Top Overlay "AC/L" at 59.45,10.825 h2 r180; Top Overlay "AC/N" at 59.6,-4.4 h2 r180; Top Overlay "-V" at 36.4,-4.2 h2 r180; Top Overlay "+V" at 36.3,3.275 h2 r180